# EAGLE board USBload2_OPL (EAGLE 9.1.0)
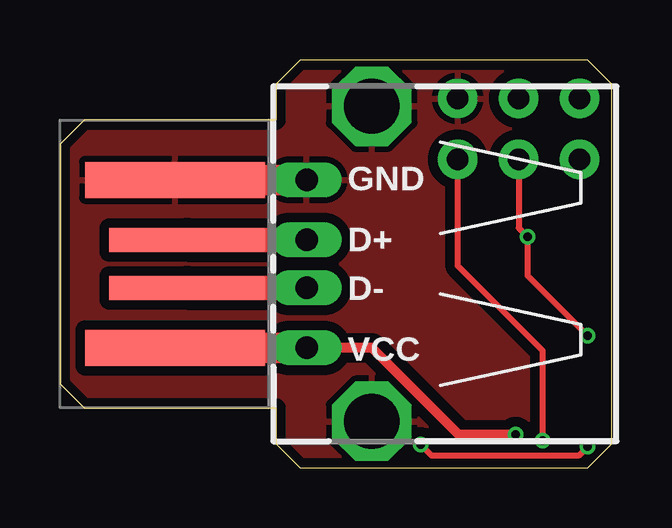
[diagram p0: board, top side]
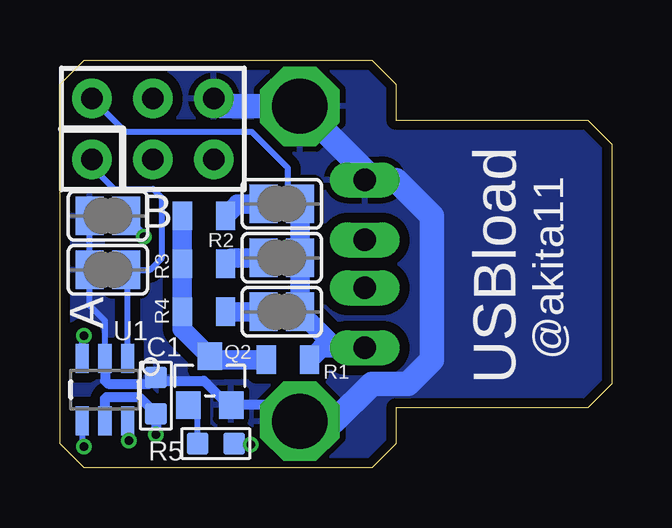
[diagram p1: board, bottom side, seen from below]

Size 23 x 17 mm. Coordinates in mm from the lower left corner, seen from the top.
Outline: 1,2.5 9,2.5 9,1 10,0 22,0 23,1 23,16 22,17 10,17 9,16 9,14.5 1,14.5 0,13.5 0,3.5 1,2.5
Copper layers (1*16): Top 0.035mm / dielectric 1.5mm / Bottom 0.035mm
Design rules "SeeedStudio_2layer_DRU_no_angle_20140221": minimum track width 6mil, minimum drill 12mil, track to track 6mil, track to pad 6mil, pad to pad 6mil, via to via 6mil, smd to smd 0mil, copper to edge 10mil, drill to drill 10mil, minimum pad ring 10mil, minimum via ring 6mil, stop-mask expansion 2mil, vias tented up to drill 100mil, thermal gap 10mil

## Footprints (pad centres in the part's own frame; a part is rotated, then mirrored left to right if it is on the bottom)
C0603 = smd 0.889 x 0.889: 1 0,0.762; 2 0,-0.762
2X03R = drill 0.9 pad 1.651: 1 -2.54,-1.27; 2 -2.54,1.27; 3 0,-1.27; 4 0,1.27; 5 2.54,-1.27; 6 2.54,1.27
JUMPER_SJ = smd 1.168 x 1.6: 1 -0.762,0; 2 0.762,0
USB-A-PCB = smd 7.5 x 1.5: 5V -0.2,-3.5; GND -0.2,3.5 | smd 6.5 x 1: USB_M 0.3,-1; USB_P 0.3,1
USB4+2P-2.0-90D = drill 0.95 long: 1 -3.5,2.71; 2 -1,2.71; 3 1,2.71; 4 3.5,2.71 | drill 2.3 octagon: SG1 -6.57,0; SG2 6.57,0
SOT-23 = smd 1.016 x 1.143: 1 -0.889,-1.016; 2 0.889,-1.016; 3 0,1.016
0805 = smd 0.8 x 1.2: 1 -0.9,0; 2 0.9,0
R0603 = smd 0.889 x 0.889: 1 0,0.762; 2 0,-0.762
SOT23-6 = smd 0.55 x 1.2: 1 -0.95,-1.3; 2 0,-1.3; 3 0.95,-1.3; 4 0.95,1.3; 5 0,1.3; 6 -0.95,1.3

## Placement (x,y rotation side)
C1  100nf  [C0603]  19,3 0 bottom
CN1  CON_AVRISPTH  [2X03R]  19.12,14.12 0 bottom
CN3  [JUMPER_SJ]  13.75,11 0 bottom
CN5  [JUMPER_SJ]  13.75,8.75 0 bottom
CN7  [JUMPER_SJ]  13.75,6.5 0 bottom
CN8  [JUMPER_SJ]  21,8.25 0 bottom
CN10  [JUMPER_SJ]  21,10.5 0 bottom
JP1  CON_USBPCB  [USB-A-PCB]  5,8.5 0 top
JP2  USB4-2.0-90D  [USB4+2P-2.0-90D]  13,8.5 90 top
Q2  CJ2302  [SOT-23]  16.75,3.62 0 bottom
R1  51  [0805]  13.5,4.5 0 bottom
R2  51  [0805]  17,10.5 0 bottom
R3  51  [0805]  17,8.5 0 bottom
R4  51  [0805]  17,6.5 0 bottom
R5  10K  [R0603]  16.5,1 270 bottom
U1  MCU_ATTINY10SOT23  [SOT23-6]  21.12,3.25 180 bottom

## Library data of the parts
C1 = Seeed-Capacitor; MPN: CC0603KRX7R9BB104
CN1 CN3 CN5 CN7 CN8 CN10 JP1 R1-R4 U1 = akita
JP2 = Seeed-Connector
Q2 = Seeed-Transistor; MPN: CJ2302
R5 = Seeed-Resistor; MPN: RC0603FR-0710KL

## Nets
+5V: C1.2 CN1.2 CN3.2 CN5.2 CN7.2 JP1.5V JP2.1 R1.2 U1.5
GND: C1.1 CN1.6 CN8.1 CN10.1 JP1.GND JP2.4 JP2.SG1 JP2.SG2 Q2.2 U1.2
MISO: CN1.1 CN8.2 U1.1
N$1: JP1.USB_M JP2.2
N$2: JP1.USB_P JP2.3
N$4: CN5.1 R3.2
N$5: CN3.1 R2.2
N$6: CN7.1 R4.2
N$7: Q2.1 R5.2
N$8: Q2.3 R1.1 R2.1 R3.1 R4.1
RST: CN1.5 U1.6
SCK: CN1.3 CN10.2 U1.3
SW: R5.1 U1.4

## Tracks (layer width: path | path; a pad name or v marks a point on that pad's centre or on a via)
+5V  (via drill 0.35)
  Top 0.406: v19,1.38 16.62,1.38 13,5 JP2.1
  Top 1.27: JP1.5V JP2.1
  Bottom 0.254: CN3.2 13.5,11.51 13.5,12.5 15,14 20.27,14 CN1.2
  Bottom 0.406: U1.5 21.12,2.88 21.06,2.94 19.7,2.94 C1.2 v19,1.38
  Bottom 0.813: CN3.2 CN5.2 CN7.2 11.49,5 JP2.1 12.1,5 R1.2
GND
  Top 1.27: JP1.GND JP2.4
  Bottom 0.254: CN10.1 CN8.1 21.76,6.76 21.12,6.12 U1.2
  Bottom 0.406: Q2.2 16.06,2.61 | U1.2 21.12,3.62 21,3.5 19.26,3.5 C1.1 18.86,3.62 17,3.62 15.98,2.61 Q2.2 | JP2.SG1 13.68,2.61 Q2.2
  Bottom 1.016: CN1.6 16.26,15.07 JP2.SG2 10.29,12.36 JP2.4 9,12 7.5,10.5 7.5,4.5 8.5,3.5 10,3.5 11.57,1.93 JP2.SG1
  pour Top (isolate 0.406): 0,14.5 9,14.5 9,17 23,17 23,0 9,0 9,2.5 0,2.5
  pour Bottom (isolate 0.406): 0,14.5 9,14.5 9,17 23,17 23,0 9,0 9,2.5 0,2.5
MISO
  Bottom 0.254: U1.1 20.18,8.19 CN8.2 19.25,8.25 18.75,8.75 18.75,11.25 19.12,11.62 20.75,11.62 21.66,12.54 CN1.1
N$1
  Top 1.016: JP1.USB_M JP2.2
N$2
  Top 1.016: JP1.USB_P JP2.3
N$4
  Bottom 0.813: R3.2 15.85,8.75 CN5.1
N$5
  Bottom 0.813: R2.2 15.6,11 CN3.1
N$6
  Bottom 0.813: R4.2 CN7.1
N$7
  Bottom 0.254: R5.2 17.26,2.23 Q2.1
N$8
  Bottom 0.813: R2.1 R3.1 R4.1 17.9,5.79 16.61,4.5 | 16.61,4.5 Q2.3 | R1.1 16.61,4.5
RST  (via drill 0.35)
  Top 0.254: v20.12,1.12 20.12,4.88 16.59,8.41 CN1.5
  Bottom 0.254: U1.6 20.18,1.3 20.12,1.25 v20.12,1.12
SCK  (via drill 0.35)
  Top 0.254: v22,5.5 19.5,8 v19.5,9.62 19.12,10 CN1.3
  Bottom 0.254: U1.3 22.07,5.42 v22,5.5 | v19.5,9.62 19.5,9.76 CN10.2
SW  (via drill 0.35)
  Top 0.254: v22,0.88 21.62,0.5 15.5,0.5 v15.05,0.95
  Bottom 0.254: U1.4 22.07,0.95 v22,0.88 | v15.05,0.95 15.69,0.95 R5.1

## Text on the board
bPlace: B | A | @akita11 | USBload